# Altium PCB Power subsystem.PcbDoc
Units mil, origin at the board's own origin, x right, y up, seen from the top; angles counter-clockwise.
Board outline 5505 x 2760 mil, 4 copper layers (Top Layer, GND, POWER, Bottom Layer), stack 33.556 mil thick; 77 components, 45 nets, 268 pads, 141 vias.
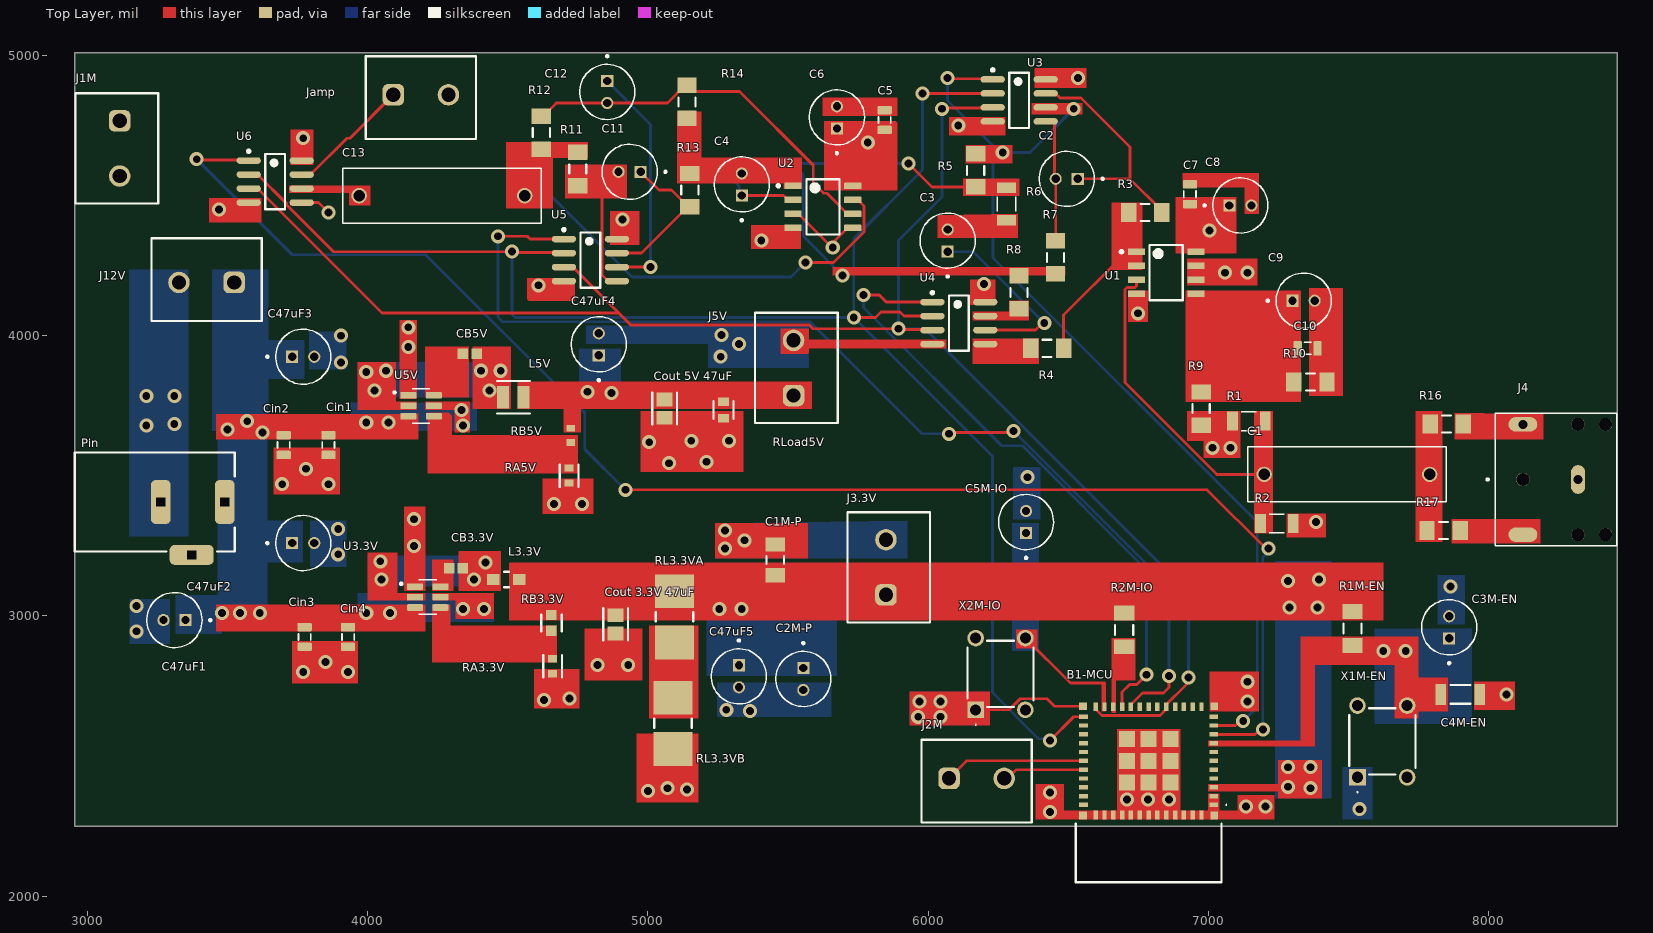
[diagram p0: Top Layer view]
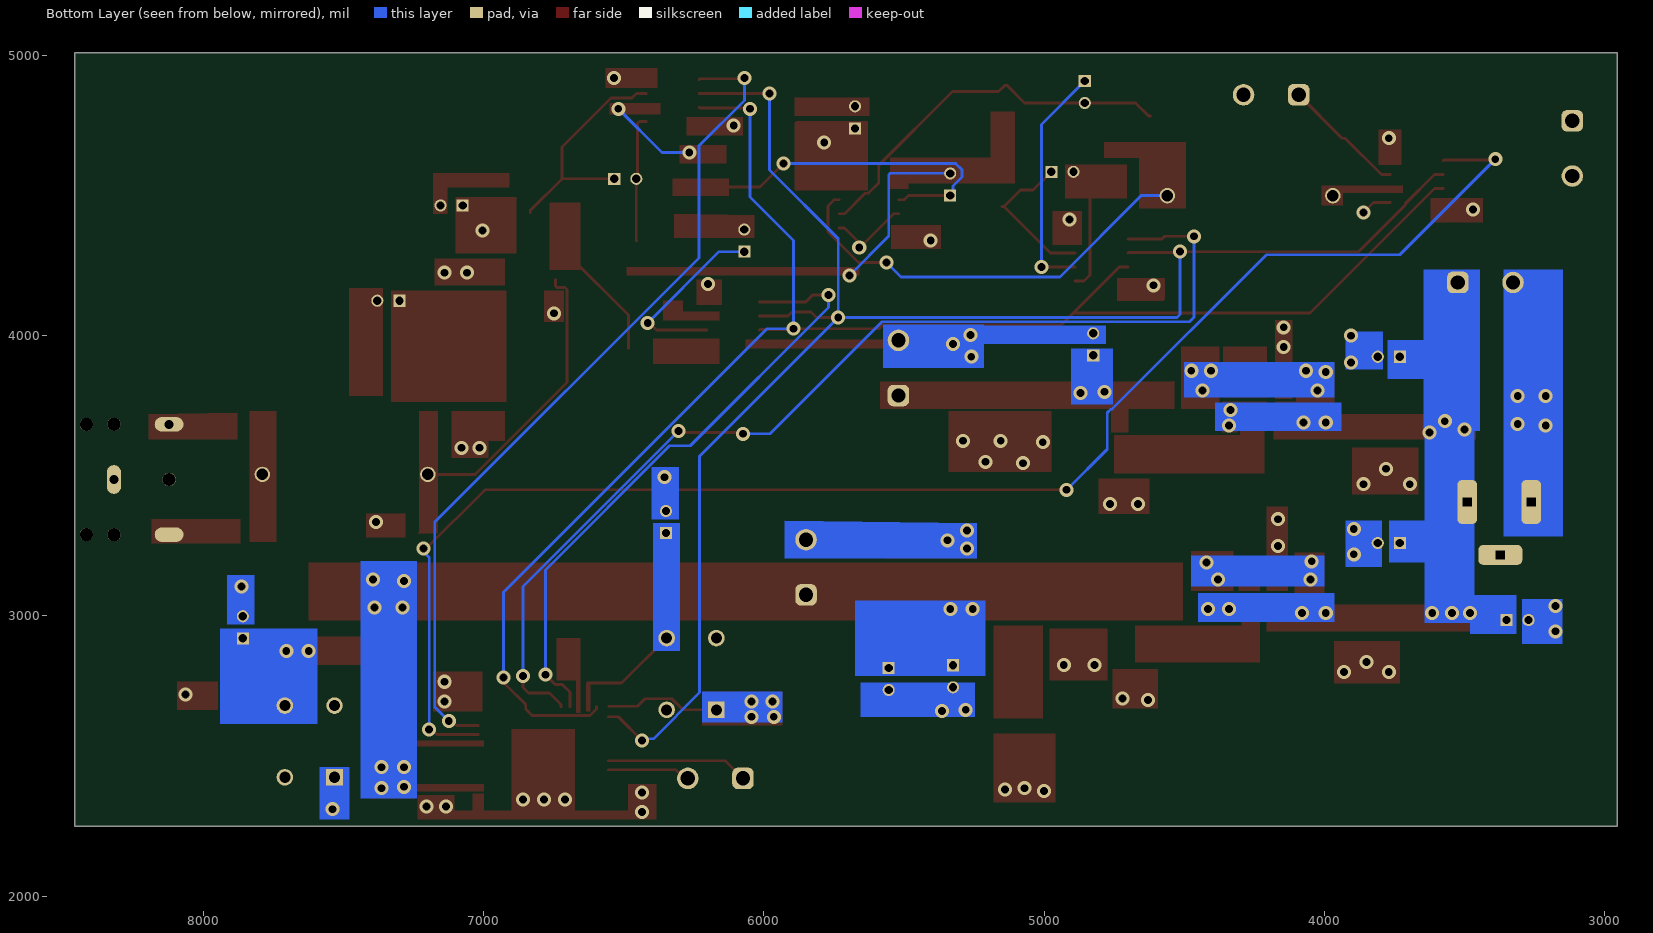
[diagram p1: Bottom Layer view, seen from below]
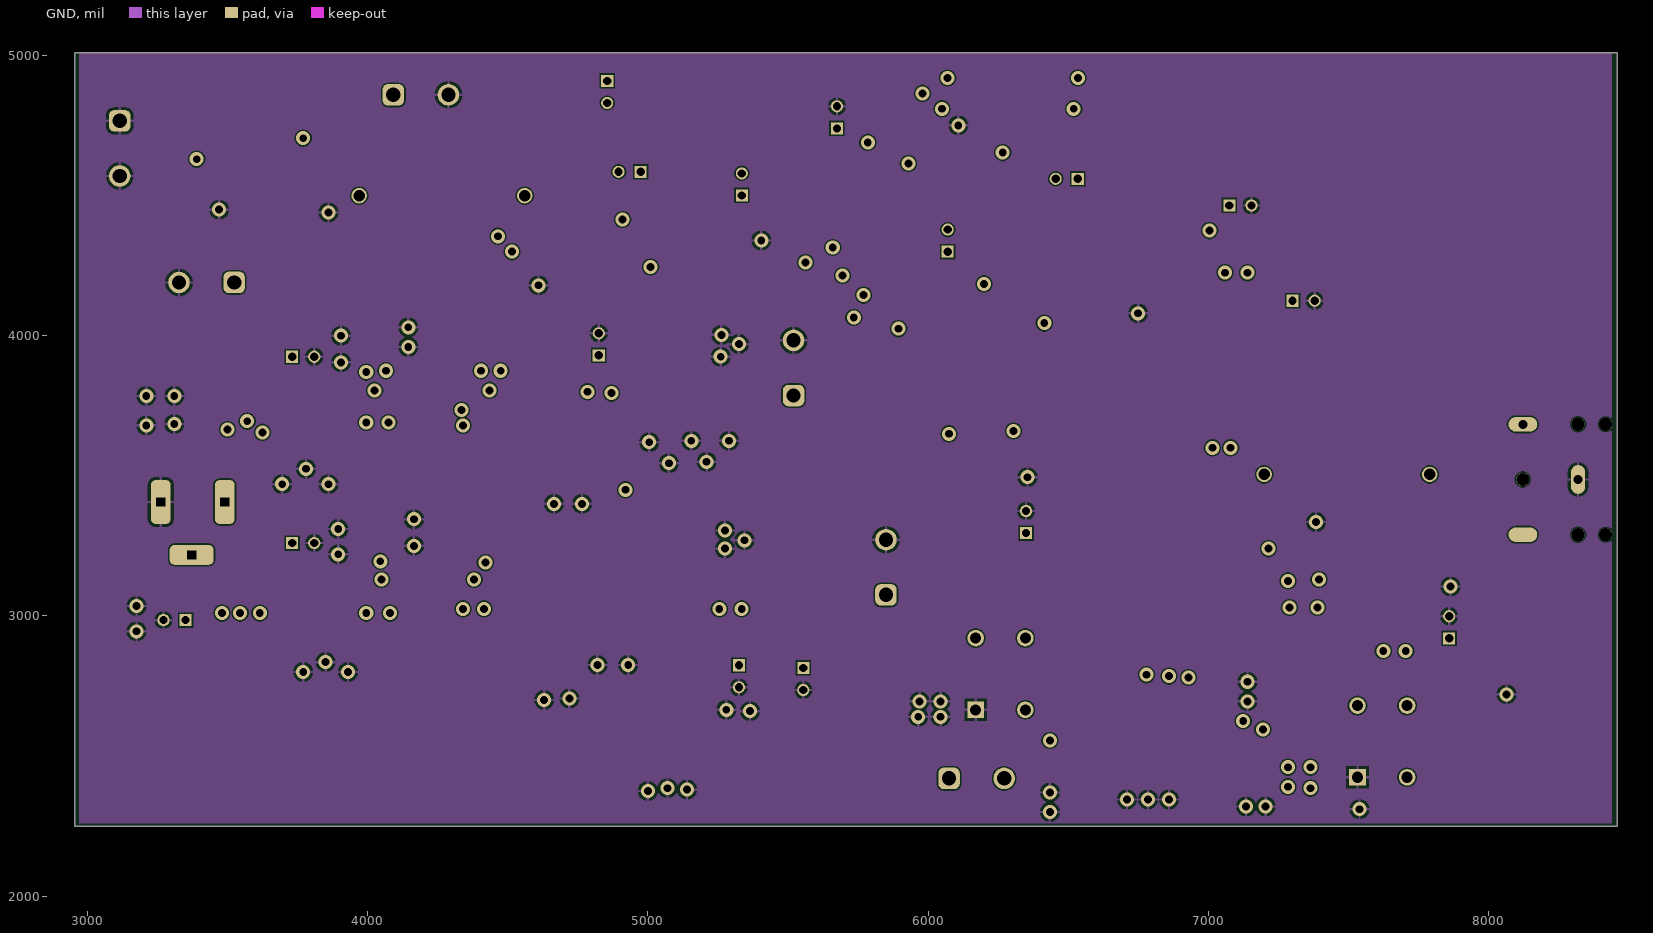
[diagram p2: GND]
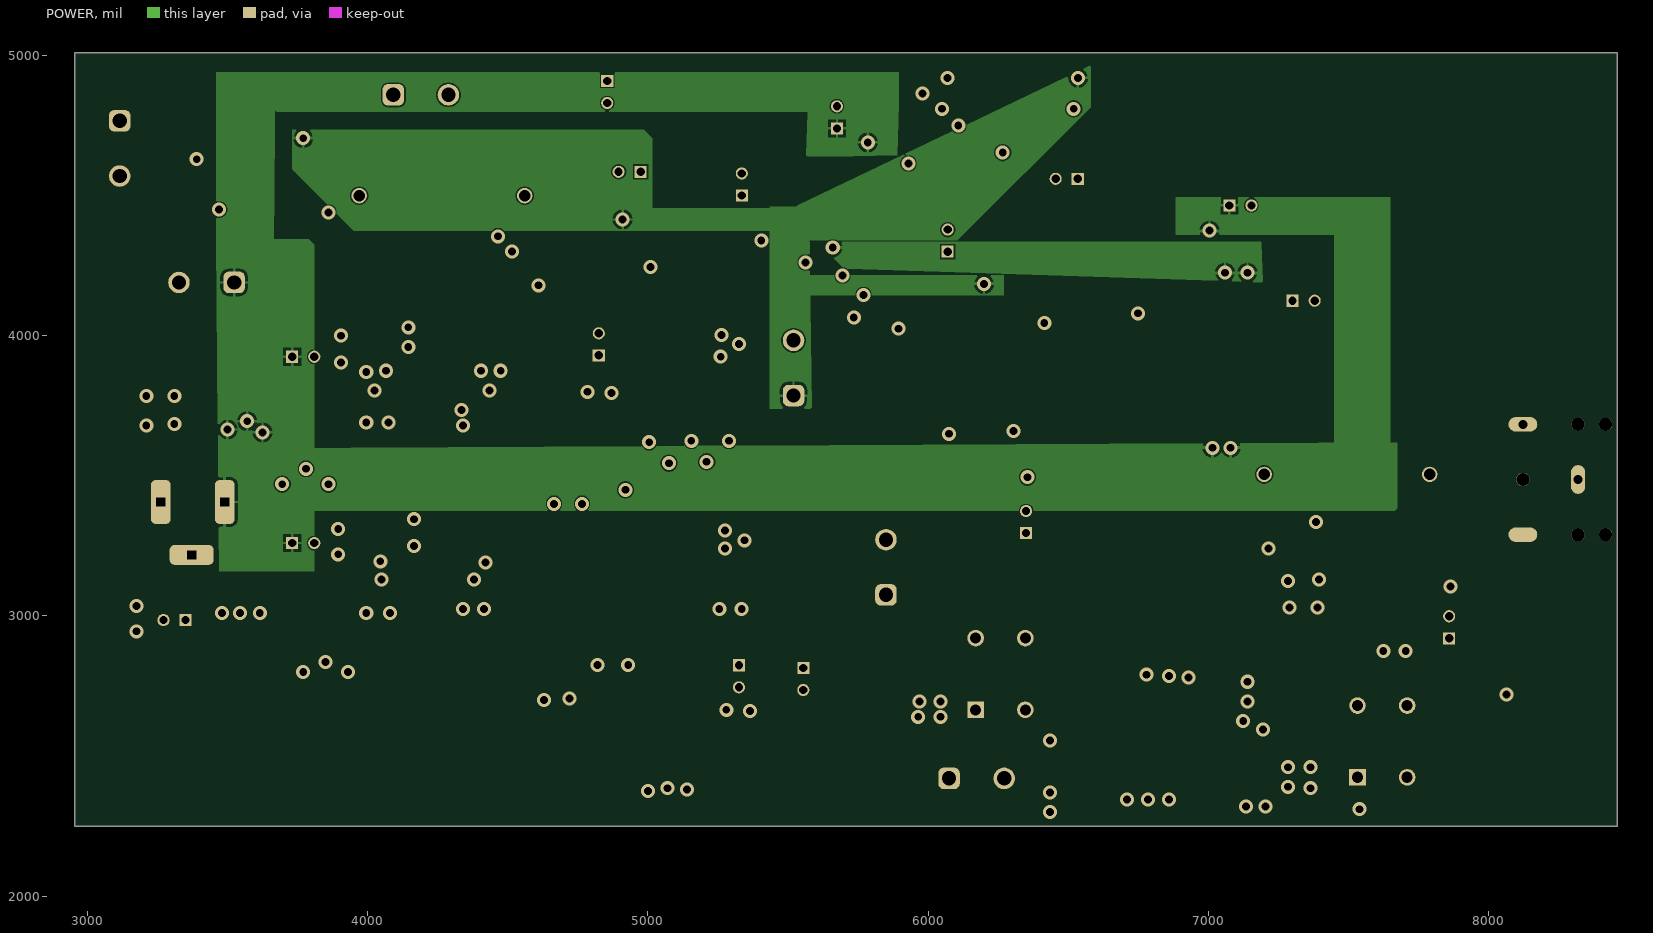
[diagram p3: POWER]
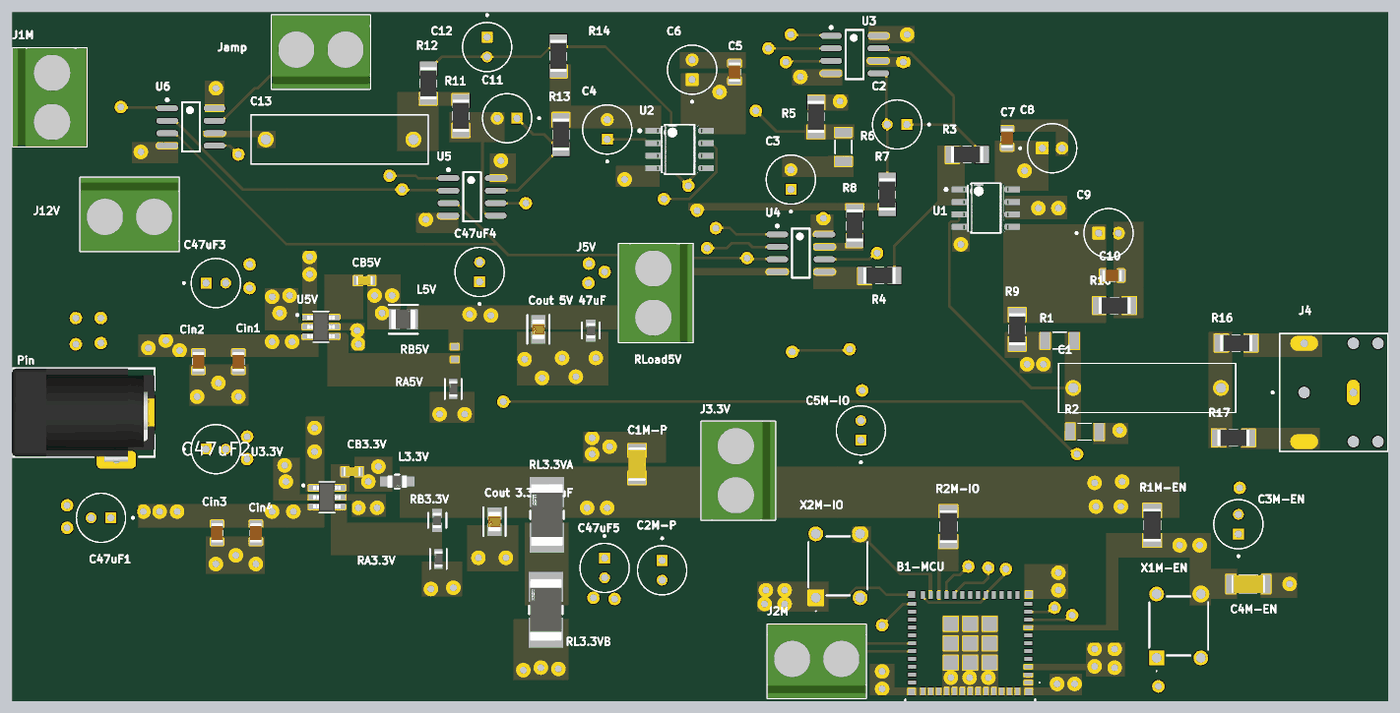
[diagram p4: 3D render of the assembled board from above, using the file's embedded part models]

## Layer stack, top to bottom
Top Solder: solder mask 0.4, Solder Resist, Dk 3.5
Top Layer: signal copper 1.4
Dielectric 1: dielectric 12.6, FR-4, Dk 4.8
GND: signal copper 1.378
Dielectric 2: prepreg 2.8, PP-006, Dk 4.1
POWER: signal copper 1.378
Dielectric 3: dielectric 12.6, FR-4, Dk 4.8
Bottom Layer: signal copper 1.4
Bottom Solder: solder mask 0.4, Solder Resist, Dk 3.5

## Board outline
2955,2250 2955,5010 8460,5010 8460,2250

## Design rules (kind name [scope] priority, off if disabled: settings)
Clearance [All] p1: gap=5 ignorepadtopadclearanceinfootprint=FALSE
MinimumSolderMaskSliver [All] p1: minsoldermaskwidth=5
PolygonConnect [All] p1: connectstyle=Relief reliefconductorwidth=10 reliefentries=4 polygonreliefangle="90 Angle" airgapwidth=10
RoutingVias [All] p1: holewidth=28 width=50 viastyle="Through Hole" minholewidth=28 minwidth=50 maxholewidth=28 maxwidth=50
SolderMaskExpansion [All] p1: expansion=4 istentingtop=FALSE
SupplyNets "Schematic Supply Nets" [InNet('GND')] p1: voltage=0.000
Width [All] p1: maxlimit=10 minlimit=5 preferedwidth=10
29 further rules are at their usual default settings.

## Classes and differential pairs
component class "mcu subsystem": B1-MCU C1M-P C2M-P C3M-EN C4M-EN C5M-IO J1M J2M R1M-EN R2M-IO X1M-EN X2M-IO
component class preamp_with_digital_pot: C1 C2 C3 C4 C5 C6 C7 C8 C9 C10 C11 C12 C13 J1 J2 J4 J5 J6 Jamp R1 R2 R3 R4 R5 R6 R7 R8 R9 R10 R11 R12 R13 R14 R16 R17 RV1 RV2 RV3 U1 U2 U3 U4 U5 U6
component class "Power subsystem": C47uF1 C47uF2 C47uF3 C47uF4 C47uF5 CB3.3V CB5V Cin1 Cin2 Cin3 Cin4 "Cout 3.3V 47uF" "Cout 5V 47uF" J3.3V J5V J12V L3.3V L5V Pin RA3.3V RA5V RB3.3V RB5V RL3.3VA RL3.3VB RLoad5V U3.3V U5V

## Components (designator, comment, footprint, x,y, rotation, side; value= is the part's Value field where it differs from the comment)
B1-MCU "ESP32-H2-MINI-1-H2S" ESP32H2MINI1H2S 6787.24,2376.46 r180 top
C1 "2.2uF" *CAPRR1500W80L1800T500H1050 7495,3505 r180 top
C1M-P "Capacitor 10 uF +/- 10% 16 V 1206" CAPC3216X180X50NL20T25 5455,3200 r90 top value=10µF
C2 "100nF" *CAPPRD200W50D500H1100_EEUFR1E470(Primary) 6495,4560 r180 top
C2M-P "100nF" *CAPPRD200W50D500H1100_EEUFR1E470(Primary) 5555,2775 r270 top
C3 "2.2nF" *CAPPRD200W50D500H1100_EEUFR1E470(Primary) 6070,4339.37 r90 top
C3M-EN "100nF" *CAPPRD200W50D500H1100_EEUFR1E470(Primary) 7860,2959.37 r90 top
C4 "22pF" *CAPPRD200W50D500H1100_EEUFR1E470(Primary) 5335.49,4540 r90 top
C4M-EN "Capacitor 1 uF +/- 10% 25 V 1206" CAPC3216X180X20ML20 7900,2720 r0 top value=1µF
C5 "Capacitor 10µF +/-20% 25V 0805" CAPC0805(2012)145_L 5845,4770 r90 top value=10µF
C5M-IO "100nF" *CAPPRD200W50D500H1100_EEUFR1E470(Primary) 6350,3335 r90 top
C6 "0.1uF" *CAPPRD200W50D500H1100_EEUFR1E470(Primary) 5675,4779.37 r90 top
C7 "Capacitor 10µF +/-20% 25V 0805" CAPC0805(2012)145_L 6935,4505 r90 top value=10µF
C8 "0.1uF" *CAPPRD200W50D500H1100_EEUFR1E470(Primary) 7115,4465 r0 top
C9 "0.1uF" *CAPPRD200W50D500H1100_EEUFR1E470(Primary) 7340.63,4125 r0 top
C10 "Capacitor 10µF +/-20% 25V 0805" CAPC0805(2012)145_L 7355,3955 r0 top value=10µF
C11 "15nF" *CAPPRD200W50D500H1100_EEUFR1E470(Primary) 4935,4585 r180 top
C12 "22nF" *CAPPRD200W50D500H1100_EEUFR1E470(Primary) 4855,4870 r270 top
C13 "2.2uF" *CAPRR1500W80L1800T500H1050 4265,4500 r180 top
C47uF1 "EEUFR1E470" *CAPPRD200W50D500H1100_EEUFR1E470(Primary) 3310.63,2985 r180 top
C47uF2 "EEUFR1E470" *CAPPRD200W50D500H1100_EEUFR1E470(Primary) 3770,3260 r0 top
C47uF3 "EEUFR1E470" *CAPPRD200W50D500H1100_EEUFR1E470(Primary) 3770,3925 r0 top
C47uF4 "EEUFR1E470" *CAPPRD200W50D500H1100_EEUFR1E470(Primary) 4825,3969.37 r90 top
C47uF5 "EEUFR1E470" *CAPPRD200W50D500H1100_EEUFR1E470(Primary) 5325,2784.37 r270 top
CB3.3V "Capacitor 100 nF +/-10% 50 V 0603" CAPC1608X90X40NL10T20 4315,3170 r0 top value=100nF
CB5V "Capacitor 100 nF +/-10% 50 V 0603" CAPC1608X90X40NL10T20 4364.61,3935 r0 top value=100nF
Cin1 "Capacitor 10µF +/-20% 25V 0805" CAPC0805(2012)145_L 3860,3610 r90 top value=10µF
Cin2 "Capacitor 10µF +/-20% 25V 0805" CAPC0805(2012)145_L 3700,3610 r90 top value=10µF
Cin3 "Capacitor 10µF +/-20% 25V 0805" CAPC0805(2012)145_L 3775,2925 r90 top value=10µF
Cin4 "Capacitor 10µF +/-20% 25V 0805" CAPC0805(2012)145_L 3930,2925 r90 top value=10µF
"Cout 3.3V 47uF" "GRM21BR60J476ME11L" FP-GRM21B-0_2-e0_2_0_7-IPC_B 4885,2970 r270 top
"Cout 5V 47uF" "GRM21BR60J476ME11L" FP-GRM21B-0_2-e0_2_0_7-IPC_B 5060,3740 r270 top
J1M "691137710002" 691137710002 3105.16,4668.43 r270 top
J2M "691137710002" 691137710002 6173.43,2410.16 r0 top
J3.3V "691137710002" 691137710002 5859.84,3173.43 r90 top
J4 "SJ1-3523N" *CUI_SJ1-3523N 8320,3486.85 r90 top
J5V "691137710002" 691137710002 5530,3885 r90 top
J12V "691137710002" 691137710002 3425,4200 r180 top
Jamp "691137710002" 691137710002 4190,4850 r0 top
L3.3V "LQM21PN3R3MGRD" FP-LQM21PH_G0-MFG 4495,3130 r0 top
L5V "MLP2520S4R7MT0S1" FP-MLP2520M-IPC_C 4520,3780 r0 top
Pin "694108301002" 694108301002 3240,3406.55 r270 top
R1 "100k" *RESC3116X65N 7145,3695 r180 top
R1M-EN "Resistor 10k +/-1% 1206 250 mW" RESC3216X60X45ML15T20 7515,2955 r270 top value=10k
R2 "100k" *RESC3116X65N 7245,3330 r180 top
R2M-IO "Resistor 10k +/-1% 1206 250 mW" RESC3216X60X45ML15T20 6700,2950 r90 top value=10k
R3 "5k" RESC3116X70X50ML13T20 6775,4440 r180 top
R4 "2.8k" RESC3116X70X50ML13T20 6425,3955 r180 top
R5 "22" RESC3116X70X50ML13T20 6170,4590 r270 top value=22k
R6 "4.7k" *RESC3116X65N 6280,4470 r90 top
R7 "5k" RESC3116X70X50ML13T20 6455,4280 r270 top
R8 "2.8k" RESC3116X70X50ML13T20 6325,4155 r270 top
R9 "47k" RESC3116X70X50ML13T20 6975,3740 r270 top
R10 "47k" RESC3116X70X50ML13T20 7365,3835 r180 top
R11 "3.6k" RESC3116X70X50ML13T20 4750,4595 r270 top
R12 "47k" RESC3116X70X50ML13T20 4620,4725 r270 top
R13 "3.6k" RESC3116X70X50ML13T20 5150,4520 r270 top
R14 "47k" RESC3116X70X50ML13T20 5140,4835 r90 top
R16 "2.2k" RESC3116X70X50ML13T20 7850.94,3685 r0 top
R17 "2.2k" RESC3116X70X50ML13T20 7840,3305 r0 top
RA3.3V "RC0603FR-0710KL" FP-RC0603-0_55-IPC_C 4660,2820 r90 top
RA5V "RC0603FR-0710KL" FP-RC0603-0_55-IPC_C 4719.14,3500.86 r90 top
RB3.3V "CRCW060333K2FKEA" FP-CRCW0603-e3-IPC_B 4655,2975 r90 top
RB5V "RC0603FR-0756K2L" RESC1608X55X25LL10T15 4725,3644.41 r90 top
RL3.3VA "CPA2512Q3R30FS-T10" FP-CPA2512-MFG 5095,2996.54 r90 top
RL3.3VB "CPA2512Q3R30FS-T10" FP-CPA2512-MFG 5090,2616.54 r90 top
RLoad5V "CRCW06031K20FKEA" FP-CRCW0603-e3-MFG 5270,3735 r90 top
U1 "OPA1656ID" FP-D0008A-MFG 6850,4225 r0 top
U2 "OPA1656ID" FP-D0008A-MFG 5625,4460 r0 top
U3 "MCP4131T-103E/SN" SOIC-SN8_N 6325.51,4840 r0 top
U3.3V "TPS561201DDCR" SOT95P280X110-6N 4214.53,3067.4 r0 top
U4 "MCP4131T-103E/SN" SOIC-SN8_N 6110,4045 r0 top
U5 "MCP4131T-103E/SN" SOIC-SN8_N 4795,4270 r0 top
U5V "TPS561201DDCR" SOT95P280X110-6N 4190.47,3750 r0 top
U6 "MCP4131T-103E/SN" SOIC-SN8_N 3670,4550 r0 top
X1M-EN "TS02-66-43-BK-100-LCR-D" TS026643BK100LCRD 7532.83,2424.09 r90 top
X2M-IO "TS02-66-43-BK-100-LCR-D" TS026643BK100LCRD 6170,2665 r90 top

## Footprints (in the part's own frame and the unit in brackets; to place one, negate y for a bottom-side part, rotate by r counter-clockwise, add the part's x,y. Pads: shape width x height; smd on the part's side, far side on the other; paste and mask are expansions set on the pad)
691137710002 [mm] "Horizontal Cable Entry with Pressure Clamp, pitch 5mm, 02p"
  rrect50% 1.95x1.95 hole 1.3: 1(-2.5,0.25)
  round 1.95 hole 1.3: 2(2.5,0.25)
  silkscreen extent -5,-3.75 5,3.75, body extent -5,-3.75 5,3.75, height 11.6
694108301002 [mm] "DC Power Jack Right Angled(6.4)"
  rrect50% 4x1.8 hole 0.8 square: 1(0,6.35) 2(0,0.55)
  rrect50% 1.8x4 hole 0.8 square: 3(4.8,3.35)
  silkscreen extent -4.5,-7.25 4.5,7.25, body extent -4.5,-7.25 5,7.25, height 10.75
*CAPPRD200W50D500H1100_EEUFR1E470(Primary) [mm]
  round 1.1 hole 0.75: N(1,0)
  rect 1.1x1.1 hole 0.75: P(-1,0)
  silkscreen extent -3.35,-2.5 2.5,2.5
*CAPRR1500W80L1800T500H1050 [mm]
  round 1.4 hole 1.05: 1(-7.5,0) 2(7.5,0)
  silkscreen extent -9,-2.5 9,2.5
*CUI_SJ1-3523N [mm]
  oval 2.616x1.308 hole 0.8: 1(0,0)
  oval 1.308x2.616 hole 0.8: 2(5,5)
  oval 1.308x2.616 all layers, no hole: 3(-5,5)
  round 1.2 hole 1.2 unplated: None(-5,-2.5) None(-5,0) None(0,5) None(5,-2.5) None(5,0)
  silkscreen extent -6,-3.5 6,8.3
*RESC3116X65N [mm]
  rect 0.97x1.73 smd: 1(-1.48,0) 2(1.48,0)
  silkscreen extent -0.67,-0.85 0.67,0.85
CAPC0805(2012)145_L [mm] "Chip Capacitor, Body 2.0x1.2mm, Height 1.45mm, IPC High Density"
  rrect25% 0.76x1.3 smd: 1(-0.9,0) 2(0.89,0)
  silkscreen extent -0.3,-0.55 0.3,0.55, body extent -1,-0.6 1,0.6, height 1.45
CAPC1608X90X40NL10T20 [mm] "Chip Capacitor, 2-Leads, Body 1.70x0.90mm, IPC Medium Density"
  rect 0.95x0.95 smd: 1(-0.625,0) 2(0.625,0)
  body extent -0.85,-0.45 0.85,0.45, height 0.9
CAPC3216X180X20ML20 [mm] "Chip Capacitor, 2-Leads, Body 3.40x1.80mm, IPC Low Density"
  rect 0.95x1.9 smd: 1(-1.775,0) 2(1.775,0)
  silkscreen extent -0.9,-0.85 0.9,0.85, body extent -1.7,-0.9 1.7,0.9, height 1.8
CAPC3216X180X50NL20T25 [mm] "Chip Capacitor, 2-Leads, Body 3.40x1.80mm, IPC Medium Density"
  rect 1.3x1.8 smd: 1(-1.4,0) 2(1.4,0)
  silkscreen extent -0.35,-0.8 0.35,0.8, body extent -1.7,-0.9 1.7,0.9, height 1.8
ESP32H2MINI1H2S [mm]
  rect 0.8x0.4 smd: 1(-5.9,1.3) 2(-5.9,0.5) 3(-5.9,-0.3) 4(-5.9,-1.1) 5(-5.9,-1.9) 6(-5.9,-2.7) 7(-5.9,-3.5) 8(-5.9,-4.3) 9(-5.9,-5.1) 10(-5.9,-5.9) 11(-5.9,-6.7) 25(5.9,-6.7) 26(5.9,-5.9) 27(5.9,-5.1) 28(5.9,-4.3) 29(5.9,-3.5) 30(5.9,-2.7) 31(5.9,-1.9) 32(5.9,-1.1) 33(5.9,-0.3) 34(5.9,0.5) 35(5.9,1.3)
  rect 0.4x0.8 smd: 12(-4.8,-7.6) 13(-4,-7.6) 14(-3.2,-7.6) 15(-2.4,-7.6) 16(-1.6,-7.6) 17(-0.8,-7.6) 18(0,-7.6) 19(0.8,-7.6) 20(1.6,-7.6) 21(2.4,-7.6) 22(3.2,-7.6) 23(4,-7.6) 24(4.8,-7.6) 36(4.8,2.2) 37(4,2.2) 38(3.2,2.2) 39(2.4,2.2) 40(1.6,2.2) 41(0.8,2.2) 42(0,2.2) 43(-0.8,2.2) 44(-1.6,2.2) 45(-2.4,2.2) 46(-3.2,2.2) 47(-4,2.2) 48(-4.8,2.2)
  rect 1.45x1.45 smd: 49(0,-2.7) 54(-1.975,-0.725) 55(-1.975,-2.7) 56(-1.975,-4.675) 57(0,-4.675) 58(1.975,-4.675) 59(1.975,-2.7) 60(1.975,-0.725) 61(0,-0.725)
  rect 0.7x0.7 smd: 50(5.95,2.25) 51(5.95,-7.65) 52(-5.95,-7.65) 53(-5.95,2.25)
  silkscreen extent -7.1,1.25 6.6,8.3
FP-CPA2512-MFG [mm]
  rect 3.05x3.5 smd paste+0 mask+0: 1(-2.325,0) 2(2.325,0)
  silkscreen extent -0.42,-1.7 0.43,1.7, body extent -3.95,-1.85 3.95,1.85, height 0.25
FP-CRCW0603-e3-IPC_B [mil]
  rect 36.81x37.88 smd paste+0 mask+0: 1(-28.17,0) 2(28.17,0)
  silkscreen extent -30,-37 30,35, body extent -56,-29 56,29, height 10
FP-CRCW0603-e3-MFG [mm]
  rect 0.75x1 smd paste+0 mask+0: 1(-0.75,0) 2(0.75,0)
  silkscreen extent -0.8,-0.9 0.8,0.9, body extent -1.22,-0.6 1.22,0.6, height 0.25
FP-D0008A-MFG [mm]
  rrect17% 1.55x0.6 smd paste+0 mask+0: 1(-2.7,1.905) 2(-2.7,0.635) 3(-2.7,-0.635) 4(-2.7,-1.905) 5(2.7,-1.905) 6(2.7,-0.635) 7(2.7,0.635) 8(2.7,1.905)
  silkscreen extent -4.17,-2.5 1.5,2.5, body extent -3.57,-2.75 3.57,2.75, height 0.25
FP-GRM21B-0_2-e0_2_0_7-IPC_B [mil]
  rect 49.4x57.33 smd paste+0 mask+0: 1(-32.51,0) 2(32.51,0)
  silkscreen extent -57,-44 57,44, body extent -67,-39 67,39, height 10
FP-LQM21PH_G0-MFG [mm]
  rect 1.15x1 smd paste+0 mask+0: 1(-1.175,0) 2(1.175,0)
  silkscreen extent -0.22,-0.7 0.22,0.7, body extent -1.85,-0.8 1.85,0.8, height 0.25
FP-MLP2520M-IPC_C [mil]
  rect 43.52x81.03 smd paste+0 mask+0: 1(-36.47,0) 2(36.47,0)
  silkscreen extent -58,-58 58,58, body extent -62,-46 62,46, height 10
FP-RC0603-0_55-IPC_C [mil]
  rect 25.93x31.97 smd paste+0 mask+0: 1(-26.64,0) 2(26.64,0)
  silkscreen extent -40,-33 40,33, body extent -44,-22 44,22, height 10
RESC1608X55X25LL10T15 [mm] "Chip Resistor, 2-Leads, Body 1.70x0.90mm, IPC High Density"
  rect 0.6x0.8 smd: 1(-0.65,0) 2(0.65,0)
  body extent -0.85,-0.45 0.85,0.45, height 0.55
RESC3116X70X50ML13T20 [mm] "Chip Resistor, 2-Leads, Body 3.25x1.65mm, IPC Low Density"
  rect 1.4x1.75 smd: 1(-1.5,0) 2(1.5,0)
  silkscreen extent -0.4,-0.77 0.4,0.77, body extent -1.63,-0.82 1.63,0.82, height 0.7
RESC3216X60X45ML15T20 [mm] "Chip Resistor, 2-Leads, Body 3.3x1.75mm, IPC Low Density"
  rect 1.35x1.85 smd: 1(-1.525,0) 2(1.525,0)
  silkscreen extent -0.45,-0.82 0.45,0.82, body extent -1.65,-0.87 1.65,0.87, height 0.6
SOIC-SN8_N [mm] "SOIC, 8-Leads, Body 4.9x3.9mm, Pitch 1.27mm, IPC Medium Density"
  oval 2.2x0.6 smd: 1(-2.4,1.905) 2(-2.4,0.635) 3(-2.4,-0.635) 4(-2.4,-1.905) 5(2.4,-1.905) 6(2.4,-0.635) 7(2.4,0.635) 8(2.4,1.905)
  silkscreen extent -2.52,-2.5 0.9,2.88, body extent -2,-2.5 2,2.5, height 1.75
SOT95P280X110-6N [mm]
  rrect25% 1.45x0.59 smd: 1(-1.155,0.95) 2(-1.155,0) 3(-1.155,-0.95) 4(1.155,-0.95) 5(1.155,0) 6(1.155,0.95)
  silkscreen extent -2.5,-1.56 0.8,1.57, body extent -1.4,-1.45 1.4,1.45, height 1.1
TS026643BK100LCRD [mm]
  rect 1.5x1.5 hole 1: 1(0,0)
  round 1.5 hole 1: 2(6.5,0) 3(0,-4.5) 4(6.5,-4.5)
  silkscreen extent -1.4,-5.25 6.25,0.75

## Part data
B1-MCU: library part CMP-005-000000-1, "802.15.4, Bluetooth Bluetooth v5.3, Zigbee Transceiver Module 2.4GHz PCB Trace Surface Mount, 3V ~ 3.6V , -40C ~ 105C (TA)", Manufacturer_Name="Espressif Systems", Datasheet Link=https://documentation.espressif.com/api/resource/doc/file/nzV9jBYD/FILE/esp32-h2-mini-1_mini-1u_datasheet_en.pdf, Design Item ID=ESP32-H2-MINI-1-H2S, Geometry.Height=2.55mm, Manufacturer_Part_Number=ESP32-H2-MINI-1-H2S, Source=ESP32-H2-MINI-1-H2S.SchLib
C1 C13: library part B32522C0225J000, "2.2 ÂµF Film Capacitor 40V 63V Polyester, Polyethylene Terephthalate (PET), Metallized - Stacked Radial", Package="NON-STANDARD-2 TDK", Check_prices=https://www.snapeda.com/parts/B32522C0225J000/TDK/view-part/?ref=eda, DigiKey_Part_Number=495-1126-ND, MF=TDK, MP=B32522C0225J000, SnapEDA_Link=https://www.snapeda.com/parts/B32522C0225J000/TDK/view-part/?ref=snap
C1M-P: library part CMP-001-00016-6, "Chip Capacitor, 10 uF, +/- 10%, 16 V, 1206 (3216 Metric)", Capacitor Type=Ceramic, Case/Package=1206, Max Operating Temperature=125°C, Min Operating Temperature=-55°C, Tolerance=10%, Voltage Rating=16V, Mounting Technology=SM, Pins=2, RoHS Compliant=True
C2 C2M-P C3 C3M-EN C4 C5M-IO C6 C8 C9 C11 C12: library part EEUFR1E470
C4M-EN: library part CMP-001-00006-6, "Chip Capacitor, 1 uF, +/- 10%, 25 V, 1206 (3216 Metric)", Capacitor Type=Ceramic, Case/Package=1206, Max Operating Temperature=125°C, Min Operating Temperature=-55°C, Tolerance=10%, Voltage Rating=25V, Mounting Technology=SM, Pins=2, RoHS Compliant=True
C5 C7 C10 Cin1 Cin2 Cin3 Cin4: library part CMP-001-00079-4, "Chip Capacitor, 10µF +/-20%, 25V, 0805, Thickness 1.45 mm", Case/Package=0805, Max Operating Temperature=85°C, Min Operating Temperature=-55°C, Tolerance=10%, Voltage Rating=25V, Mounting Technology=SMT, Pins=2
CB3.3V CB5V: library part CMP-001-00017-6, "Chip Capacitor, 100 nF, +/- 10%, 50 V, 0603 (1608 Metric)", Capacitor Type=Ceramic, Case/Package=0603, Max Operating Temperature=125°C, Min Operating Temperature=-55°C, Tolerance=10%, Voltage Rating=50V, Mounting Technology=SM, Pins=2, RoHS Compliant=True
"Cout 3.3V 47uF" "Cout 5V 47uF": library part CMP-06035-028650-1, "Chip Multilayer Ceramic Capacitors for General Purpose, 0805, 47uF, X5R, 15%, 20%, 6.3V", Capacitance=47uF, Case/Package=0805, Dielectric=X5R, Tolerance=20%, Voltage Rating (DC)=6.3V, Length=2mm, Thickness=1.25mm, Width=1.25mm
J1M J2M J3.3V J5V J12V Jamp: library part CMP-1502-03324-2, Current Rating=16A, Max Operating Temperature=120°C, Min Operating Temperature=-30°C, Voltage Rating=300V, Contact Material="Nickel, Tin", Height=11.6mm, Lead Pitch=5mm, NexarPartId=78871135, Number of Contacts=2, Number of Pins=2, Number of Rows=1, Packaging=Box, RoHS=Non-Compliant
J4: "3.5 mm, Stereo, Right Angle, Through Hole, 3 Conductors, 0 Internal Switches, Audio Jack Connector", Package=None, Check_prices=https://www.snapeda.com/parts/SJ1-3523N/Same+Sky/view-part/?ref=eda, DigiKey_Part_Number=CP1-3523N-ND, MF="Same Sky", MP=SJ1-3523N, SnapEDA_Link=https://www.snapeda.com/parts/SJ1-3523N/Same+Sky/view-part/?ref=snap
L3.3V: library part CMP-06042-017013-1, "Multilayer Type Inductor for Power Lines, 0805 (2012), 3.3μH, 20%, 0.188Ω, 1.0A", Case/Package=0805, Current Rating=1A, DC Resistance (DCR)=188mR, Inductance=3.3uH, Max Operating Temperature=125°C, Min Operating Temperature=-55°C, Package Quantity=4000, Self Resonant Frequency=30MHz, Test Frequency=1MHz, Tolerance=20%, Core Material=Ferrite, Height - Seated (Max)=0.039inch, Length=0.079inch, Mount="Surface Mount", Packaging="Tape and Reel", RoHS Compliant=Yes, Shielding=Shielded, Width=0.049inch
L5V: library part CMP-08253-000319-1, "Shielded Multilayer Inductor 4.7uH ±20% 1000mA 169mΩ SMD 1008", Case Code (Imperial)=1008, Case Code (Metric)=2520, Current Rating=1A, DC Resistance (DCR)=169mR, Inductance=4.7uH, Max Operating Temperature=125°C, Min Operating Temperature=-40°C, Package Quantity=3000, Test Frequency=2MHz, Tolerance=20%, Case/Package=1008, Core Material=Ferrite, Height - Seated (Max)=0.039inch, Length=0.098inch, Mount="Surface Mount", Packaging="Tape and Reel", RoHS Compliant=Yes, Shielding=Shielded, Width=0.079inch
Pin: library part CMP-1502-00190-3, Color=Black, Current Rating=5A, Flammability Rating="UL94 V-0", Insulation Resistance=100MΩ, Max Operating Temperature=85°C, Min Operating Temperature=-40°C, Operating Supply Voltage=24V, Voltage Rating (DC)=20V, Connector Type=Power, Contact Gender=Female, Contact Material="Gold, Tin", Contact Plating=Tin, Gender=Male, Height=11mm, Housing Material=Polyamide, Mount="Through Hole", NexarPartId=52676102, Number of Contacts=3, Packaging=Bulk, REACH SVHC=Unknown, RoHS=Compliant, Shielding=Unshielded, Termination="Through Hole", Voltage Rating=24V
R1 R2: library part RC1206FR-07100KL, "100 kOhms Â±1% 0.25W, 1/4W Chip Resistor 1206 (3216 Metric) Moisture Resistant Thick Film", Package="3116 Yageo", Check_prices=https://www.snapeda.com/parts/RC1206FR-07100KL/Yageo/view-part/?ref=eda, DigiKey_Part_Number=311-100KFRCT-ND, MF=Yageo, MP=RC1206FR-07100KL, SnapEDA_Link=https://www.snapeda.com/parts/RC1206FR-07100KL/Yageo/view-part/?ref=snap
R1M-EN R2M-IO: library part CMP-009-00016-5, "Chip Resistor, 10 KOhm, +/- 1%, 0.25 W, -55 to 155 degC, 1206 (3216 Metric)", Case/Package=1206, Max Operating Temperature=155°C, Min Operating Temperature=-55°C, Power=250mW, Tolerance=1%, Voltage Rating=200V, Mounting Technology=SM, Pins=2, RoHS Compliant=True
R3 R7: library part CMP-009-00008-5, "Chip Resistor, 5k Ohm, 0.25 W, -55 to 155 degC, 1206 (3216 Metric)", Case/Package=1206, Max Operating Temperature=155°C, Min Operating Temperature=-55°C, Power=250mW, Tolerance=0.05%, Voltage Rating=200V, Mounting Technology=SM, Pins=2, RoHS Compliant=True
R4 R8: library part CMP-009-00008-5, "Chip Resistor, 2.8k Ohm, 0.25 W, -55 to 155 degC, 1206 (3216 Metric)", Case/Package=1206, Max Operating Temperature=155°C, Min Operating Temperature=-55°C, Power=250mW, Tolerance=0.05%, Voltage Rating=200V, Mounting Technology=SM, Pins=2, RoHS Compliant=True
R5: library part CMP-009-00008-5, "Chip Resistor, 22k Ohm, 0.25 W, -55 to 155 degC, 1206 (3216 Metric)", Case/Package=1206, Max Operating Temperature=155°C, Min Operating Temperature=-55°C, Power=250mW, Tolerance=0.05%, Voltage Rating=200V, Mounting Technology=SM, Pins=2, RoHS Compliant=True
R6: library part RC1206FR-074K7L, "4.7 kOhms Â±1% 0.25W, 1/4W Chip Resistor 1206 (3216 Metric) Moisture Resistant Thick Film", Package="3116 Yageo", Check_prices=https://www.snapeda.com/parts/RC1206FR-074K7L/Yageo/view-part/?ref=eda, DigiKey_Part_Number=311-4.70KFRCT-ND, MF=Yageo, MP=RC1206FR-074K7L, SnapEDA_Link=https://www.snapeda.com/parts/RC1206FR-074K7L/Yageo/view-part/?ref=snap
R9 R10 R12 R14: library part CMP-009-00008-5, "Chip Resistor, 47k Ohm, 0.25 W, -55 to 155 degC, 1206 (3216 Metric)", Case/Package=1206, Max Operating Temperature=155°C, Min Operating Temperature=-55°C, Power=250mW, Tolerance=0.05%, Voltage Rating=200V, Mounting Technology=SM, Pins=2, RoHS Compliant=True
R11 R13: library part CMP-009-00008-5, "Chip Resistor, 3.6k Ohm, 0.25 W, -55 to 155 degC, 1206 (3216 Metric)", Case/Package=1206, Max Operating Temperature=155°C, Min Operating Temperature=-55°C, Power=250mW, Tolerance=0.05%, Voltage Rating=200V, Mounting Technology=SM, Pins=2, RoHS Compliant=True
R16 R17: library part CMP-009-00008-5, "Chip Resistor, 2.2k Ohm, 0.25 W, -55 to 155 degC, 1206 (3216 Metric)", Case/Package=1206, Max Operating Temperature=155°C, Min Operating Temperature=-55°C, Power=250mW, Tolerance=0.05%, Voltage Rating=200V, Mounting Technology=SM, Pins=2, RoHS Compliant=True
RA3.3V RA5V: library part CMP-2100-03664-2, "RES 10K OHM 1% 1/10W 0603", Case Code (Imperial)=0603, Case Code (Metric)=1608, Max Operating Temperature=155°C, Max Power Dissipation=100mW, Min Operating Temperature=-55°C, Resistance=10kR, Resistance Tolerance=1%, Resistor Type="Thick Film", Temperature Coefficient=100ppm/°C, Voltage Rating=75V, Voltage Rating (DC)=50V, Case/Package=0603, Construction=Rectangular, Depth=0.8mm, Features="Moisture Resistant", Height=0.45mm, Lead Free="Lead Free", Lead Pitch=0.3mm, Length=1.6mm, Military Standard=Not, Number of Pins=2, Number of Terminations=2, Packaging="Tape and Reel", Power Rating=100mW, RoHS Compliant=Yes, Series=RC, Size Code=0603, Termination=SMD/SMT, Tolerance=1%, Weight=7.1E-05oz, Width=0.8mm
RB3.3V: library part CMP-2000-03248-2, "RES Thick Film, 33.2kΩ, 1%, 0.1W, 100ppm/°C, 0603", Case Code (Imperial)=0603, Case Code (Metric)=1608, Max Operating Temperature=155°C, Max Power Dissipation=100mW, Min Operating Temperature=-55°C, Package Quantity=5000, Resistance=33.2kR, Temperature Coefficient=100ppm/°C, Tolerance=1%, Voltage Rating=75V, Case/Package=0603, Composition="Thick Film", Contact Plating=Tin, Depth=0.85mm, Features="Automotive AEC-Q200", Height=0.45mm, Lead Free="Lead Free", Length=1.55mm, Military Standard=Not, Mount="Surface Mount", Number of Pins=2, Number of Terminations=2, Packaging="Tape and Reel", Power Rating=100mW, Radiation Hardening=No, Termination=SMD/SMT, Voltage Rating (DC)=75V, Weight=7.1E-05oz, Width=0.85mm
RB5V: library part CMP-1659-00050-1, "Chip Resistor, 56.2 KOhm, +/- 1%, 0.1 W, -55 to 155 degC, 0603 (1608 Metric), RoHS, Tape and Reel", Colour=Black, Current Rating="1 A", Max Operating Temperature="50 degC", Min Operating Temperature="0 degC", Package Quantity=24000, Voltage Rating="30 V", ComponentLink1Description="Manufacturer URL", ComponentLink1URL=http://www.yageo.com/, ComponentLink2Description=Datasheet, ComponentLink2URL=http://www.yageo.com/documents/recent/PYu-RC_Group_51_RoHS_L_04.pdf, Connector Type=USB, Contact Material=Copper, Contact Plating=Gold, DatasheetVersion="Rev. 4, 02/2016", Gender=Female, Height="15 mm", Length="14.5 mm", Mount="Through Hole", PackageDescription="2-Pin Surface Mount Device, Body 1.6 x 0.8 mm", PackageReference=0603, Packaging=Tray, Pins=4, Radiation Hardening=No, REACH SVHC=Unknown, RoHSCompliant=true, Width="7.12 mm"
RL3.3VA RL3.3VB: library part CMP-00597-19168341-1, "CPA2512Q3R30FS-T10 CPA Series 2512 16 W 3.3O ±1% ±50 ppm/°C SMT Thin Film Chip Power Resistor", Case Code (Imperial)=2512, Case Code (Metric)=6432, Max Operating Temperature=155°C, Max Power Dissipation=16W, Min Operating Temperature=-55°C, Resistance=3.3Ω, Temperature Coefficient=50ppm/°C, Tolerance=1%, Case/Package=2512, Composition="Thin Film", Features="Moisture Resistant", Height=787.4µm, Lead Free="Lead Free", Length=6.2992mm, Lifecycle Status=Production, NexarPartId=19168341, Number of Terminations=2, Packaging="Cut Tape (CT)", Power Rating=16W, RoHS=Compliant, Width=3.2mm
RLoad5V: library part CMP-2000-02982-2, "RES Thick Film, 1.2kΩ, 1%, 0.1W, 100ppm/°C, 0603", Case Code (Imperial)=0603, Case Code (Metric)=1608, Max Operating Temperature=155°C, Max Power Dissipation=100mW, Min Operating Temperature=-55°C, Package Quantity=10, Resistance=1.2kR, Temperature Coefficient=100ppm/°C, Tolerance=1%, Voltage Rating=75V, Case/Package=0603, Composition="Thick Film", Contact Plating=Tin, Depth=0.85mm, Features="Automotive AEC-Q200", Height=0.45mm, Lead Free="Lead Free", Length=1.55mm, Military Standard=Not, Mount="Surface Mount", Number of Terminations=2, Packaging="Tape and Reel", Power Rating=100mW, Radiation Hardening=No, Termination=SMD/SMT, Voltage Rating (DC)=75V, Weight=7.1E-05oz, Width=0.033inch
U1 U2: library part CMP-04894-000051-1, "IC AUDIO 2 CIRCUIT 8SOIC"
U3 U4 U5 U6: library part CMP-0188-00377-2, "7/8-Bit Single/Dual SPI Digital POT with Volatile Memory, 8-Pin SOIC 150mil, Extended Temperature, Tape and Reel", Code_IPC=SOIC127P600-8, Code_JEDEC=MS-012, ComponentLink1Description="Manufacturer URL", ComponentLink1URL=http://www.microchip.com/, ComponentLink2Description=Datasheet, ComponentLink2URL=http://ww1.microchip.com/downloads/en/DeviceDoc/22060b.pdf, ComponentLink3Description="Package Specification", ComponentLink3URL=http://www.microchip.com/stellent/groups/techpub_sg/documents/packagingspec/en012702.pdf, DatasheetVersion="revB, Dec-2008", PackageDescription="8-Lead Plastic Small Outline (SN) - Narrow, 3.90mm Body [SOIC]", PackageReference=SOIC-SN8, PackageVersion="revBB, Aug-2009", RevisionNote="URLs added."
U3.3V U5V: library part CMP-003-000000-1, "4.5V to 17V Input, 1A Synchronous Step-Down Voltage Regulator in 6-pin SOT-23", Package="SOT-23-THN-6 Texas Instruments", Check_prices=https://www.snapeda.com/parts/TPS561201DDCR/Texas+Instruments/view-part/?ref=eda, Component Type=Standard, Design Item ID=TPS561201DDCR, MF="Texas Instruments", MP=TPS561201DDCR, Pin Count=6, SnapEDA_Link=https://www.snapeda.com/parts/TPS561201DDCR/Texas+Instruments/view-part/?ref=snap, Source=TPS561201DDCR.SchLib
X1M-EN X2M-IO: library part CMP-011-00015-1, "TS02-66-43-BK-100-LCR-D - 6 x 6 mm, 4.3 mm Actuator Height, 100 gf, Black, Long Crimped, Through Hole, SPST, Tactile Switch", Manufacturer_Name="Same Sky", Mouser Part Number=179-TS026643BK100LCR, Datasheet Link=https://www.sameskydevices.com/product/resource/TS02-66-43-BK-100-LCR-D.pdf, Design Item ID=TS02-66-43-BK-100-LCR-D, Geometry.Height=4.5mm, Manufacturer_Part_Number=TS02-66-43-BK-100-LCR-D, Mouser Price/Stock=https://www.mouser.co.uk/ProductDetail/Same-Sky/TS02-66-43-BK-100-LCR-D?qs=A6eO%252BMLsxmQKx8LKBmCQ6w%3D%3D, Source=TS02-66-43-BK-100-LCR-D.SchLib

## Via types
v1: diameter 50, hole 28, Top Layer to Bottom Layer, 141 vias

## Nets (pads, with @x,y where several pads share a name; then routed paths per layer and width w, separated by ;. In a path a pad name is that pad's centre, name@x,y a point inside that pad or via, vN(x,y) a via of type N, cw(c..) or ccw(c..) an arc to the next point about the centre after c; other vN are vias at no path point)
GND: "Cout 3.3V 47uF.2" "Cout 5V 47uF.2" B1-MCU.1 B1-MCU.2 B1-MCU.36 B1-MCU.37 B1-MCU.38 B1-MCU.39 B1-MCU.40 B1-MCU.41 B1-MCU.42 B1-MCU.43 B1-MCU.44 B1-MCU.45 B1-MCU.46 B1-MCU.47 B1-MCU.48 B1-MCU.49 B1-MCU.50 B1-MCU.51 B1-MCU.52 B1-MCU.53 B1-MCU.54 B1-MCU.55 B1-MCU.56 B1-MCU.57 B1-MCU.58 B1-MCU.59 B1-MCU.60 B1-MCU.61 C1M-P.2 C2M-P.N C3M-EN.N C4M-EN.2 C5.2 C5M-IO.N C6.N C7.2 C8.N C9.N C10.2 C47uF1.N C47uF2.N C47uF3.N C47uF4.N C47uF5.N Cin1.1 Cin2.1 Cin3.1 Cin4.1 J1M.1 J1M.2 J3.3V.2 J4.1 J5V.2 J12V.2 Jamp.2 Pin.2 R2.1 R10.1 RA3.3V.1 RA5V.1 RL3.3VB.1 RLoad5V.1 U1.4 U2.4 U3.3V.1 U3.4 U4.4 U5.4 U5V.1 U6.4 U6.5 X1M-EN.1 X2M-IO.1 | length 520.5
  Top Layer w10: U6.5 3825,4475 v1(3860,4440) ; X2M-IO.1 6289.53,2665 6329.06,2704.53 6424.06,2704.53 6450.95,2677.64 B1-MCU.51
  other v1: 6435,2300 7540,2310 7135,2320 7205,2320 6710,2345 6785,2345 6860,2345 6435,2370 5000,2375 5140,2380 5070,2385 5965,2640 6045,2640 5365,2660 5280,2665 5970,2695 6045,2695 7140,2695 4630,2700 4720,2705 8065,2720 7140,2765 3770,2800 3930,2800 4820,2825 4930,2825 3850,2835 3175,2945 3175,3035 7865,3105 3895,3220 5275,3240 4165,3250 5345,3270 5275,3305 3895,3310 7385,3335 4165,3345 4665,3400 4765,3400 3695,3470 3860,3470 6355,3495 3780,3525 5075,3545 5210,3550 5005,3620 5155,3625 5290,3625 3210,3680 3310,3685 3210,3785 3310,3785 3905,3905 5260,3925 4145,3960 5325,3970 3905,4000 5262.34,4003.07 4145,4030 6750,4080 4610,4180 5405,4340 3470,4450 6108.03,4750.89
NetB1-MCU_3: "Cout 3.3V 47uF.1" B1-MCU.3 C1M-P.1 C2M-P.P C47uF5.P J3.3V.1 L3.3V.2 R1M-EN.1 R2M-IO.2 RB3.3V.2 RL3.3VA.2
  other v1: 7365,2385 7285,2390 7285,2460 7365,2460 5255,3025 5335,3025 7290,3030 7390,3030 7285,3125 7395,3130
NetB1-MCU_8: B1-MCU.8 C3M-EN.P C4M-EN.1 R1M-EN.2 X1M-EN.4
  other v1: 7625,2875 7705,2875
NetB1-MCU_9: B1-MCU.9 U6.1 | length 5500.6
  Top Layer w10: v1(3390,4630) 3392.5,4627.5 3573.01,4627.5 U6.1 ; v1(4920,3450) 6995.86,3450 7205.86,3240 v1(7215,3240) ; B1-MCU.9 7166.42,2577.24 7184.18,2595 v1(7195,2595)
  Bottom Layer w10: v1(3390,4630) 3730.9,4289.1 4206.76,4289.1 4757.93,3737.93 4762.07,3737.93 4775,3725 4775,3595 v1(4920,3450) ; v1(7195,2595) 7195,3209.18 7215,3229.18 v1(7215,3240)
NetB1-MCU_10: B1-MCU.10 U3.1 | length 3048.7
  Top Layer w10: v1(6070,4920) 6072.5,4917.5 6228.52,4917.5 U3.1 ; B1-MCU.10 7097.92,2608.74 7114.18,2625 v1(7125,2625)
  Bottom Layer w10: v1(6070,4920) 6070,4839.5 6231.49,4678 6231.49,4278 7175,3334.5 7175,2675 v1(7125,2625)
NetB1-MCU_16: B1-MCU.16 B1-MCU.24 U3.3 U4.3 U5.3 U6.3 | length 6098.1
  Top Layer w10: U6.3 3607.01,4525 4051,4081 4896,4081 ; U5.3 4732.01,4245 4896,4081 ; U4.3 6013.01,4022.5 5897.5,4022.5 v1(5895,4025) 5589.14,4025 5576.08,4038.07 4938.94,4038.07 4896,4081 ; v1(6050,4810) 6052.5,4812.5 6228.52,4812.5 U3.3 ; B1-MCU.24 6598.27,2667.8 6608.79,2657.28 6608.79,2657.07 6620.86,2645 6827.44,2645 6850.24,2667.8 6850.24,2683.54 6922.35,2755.65 6922.35,2772.35 v1(6930,2780)
  Bottom Layer w10: v1(6050,4810) 6050,4495 5895,4340 v1(5895,4025) 5989.5,4025 6930,3084.5 v1(6930,2780)
NetB1-MCU_20: B1-MCU.20 U5.1 | length 3859.4
  Top Layer w10: v1(4465,4355) 4569.4,4355 4579.4,4345 U5.1 ; v1(6075,3650) 6080,3655 6300,3655 v1(6305,3660) ; B1-MCU.20 6724.25,2683.54 6765.71,2725 6840,2725 6860,2745 v1(6860,2785)
  Bottom Layer w10: v1(4465,4355) 4465,4065.86 4480.86,4050 5579.14,4050 5979.14,3650 v1(6075,3650) ; v1(6305,3660) 6305.36,3660 6860,3105.36 v1(6860,2785)
NetB1-MCU_21: B1-MCU.21 U4.1 | length 2237.5
  Top Layer w10: v1(5770,4145) 5825.82,4145 5850.82,4120 U4.1 ; B1-MCU.21 6692.76,2727.76 6719.93,2754.93 6744.93,2754.93 v1(6780,2790)
  Bottom Layer w10: v1(5770,4145) 5770,4100.5 6263.18,3607.32 6336.82,3607.32 6780,3164.14 v1(6780,2790)
NetB1-MCU_22: B1-MCU.22 R2M-IO.1
NetB1-MCU_23: B1-MCU.23 C5M-IO.P X2M-IO.4 | length 357.4
  Top Layer w10: X2M-IO.4 6508.07,2760 6630,2760 ; B1-MCU.23 B1-MCU.23@6629.76,2683.54
NetB1-MCU_25: B1-MCU.25 U3.2 U4.2 U5.2 U6.2 | length 6115
  Top Layer w10: U6.2 3607.01,4575 3711.18,4470.83 3711.18,4465.97 3877.15,4300 v1(4515,4300) 4517.5,4297.5 4698.01,4297.5 U5.2 ; v1(5735,4065) 5812.61,4065 5832.61,4085 5899.4,4085 5914.4,4070 U4.2 ; v1(5980,4865) U3.2 ; v1(6435,2555) 6520.24,2640.24 B1-MCU.25
  Bottom Layer w10: v1(4515,4300) 4515,4075.86 4525.86,4065 v1(5735,4065) ; v1(5980,4865) 5980,4591.33 5735,4346.33 v1(5735,4065) ; v1(6435,2555) 6428.73,2561.26 6395,2561.26 6230,2726.26 6230,3570 v1(5735,4065)
NetB1-MCU_30: B1-MCU.30 J2M.1 | length 506
  Top Layer w10: J2M.1 6137.76,2482.76 B1-MCU.30
NetB1-MCU_31: B1-MCU.31 J2M.2 | length 296.1
  Top Layer w10: J2M.2 6284.83,2420 6316.09,2451.26 B1-MCU.31
NetC1_1: C1.1 R16.1 R17.1
NetC1_2: C1.2 R1.1 R2.2 U1.3 | length 1032.6
  Top Layer w10: U1.3 6743.7,4177.67 6737.84,4171.81 6710.22,4171.81 6703.19,4164.78 6703.19,3832.67 7030.86,3505 C1.2
NetC2_N: C2.N R7.1 U3.5 | length 455.5
  Top Layer w10: U3.5 6444.77,4765 6451.06,4758.71 6451.06,4564.57 C2.N 6455.63,4339.69 R7.1
NetC2_P: C2.P R3.1 U3.7 | length 847
  Top Layer w10: U3.7 6455.18,4865 6471.93,4848.25 6545.89,4848.25 6720.94,4673.2 6720.94,4560 ; C2.P 6720.94,4560 ; R3.1 6834.06,4446.89 6720.94,4560
NetC3_N: C3.N R6.1
NetC3_P: C3.P U4.6 | length 671.5
  Top Layer w10: U4.6 6383.43,4020 6408.43,4045 v1(6415,4045)
  Bottom Layer w10: C3.P 6160,4300 v1(6415,4045)
NetC4_N: C4.N R7.2 R8.1 R13.1 R14.1 U2.1 | length 668.5
  Top Layer w10: U2.1@5500,4535 U2.1
  Bottom Layer w10: C4.N@5325,4579.37 5325.63,4580 5549.14,4580 5555,4574.14 5555,4355 v1(5695,4215)
NetC4_P: C4.P R5.2 R6.2 U2.2 | length 1225.9
  Top Layer w10: C4.P@5325,4500.63 5484.37,4500.63 5500,4485 U2.2 ; v1(5930,4615) 6014.06,4530.94 R5.2
  Bottom Layer w10: C4.P@5325,4500.63 5325,4534.61 5293.35,4566.26 5293.35,4592.48 5315.86,4615 v1(5930,4615)
NetC5_1: C5.1 C6.P C7.1 C8.P C47uF1.P C47uF2.P C47uF3.P Cin1.2 Cin2.2 Cin3.2 Cin4.2 J12V.1 Pin.1 R1.2 R9.2 U1.8 U2.8 U3.3V.3 U3.3V.5 U5V.3 U5V.5 | length 45
  Top Layer w10: U5V.3 U5V.3@4151.61,3719.21 ; U3.3V.3 U3.3V.3@4175.67,3036.61 ; U5V.5@4229.33,3743.39 U5V.5 ; U3.3V.5@4243.07,3067.4 U3.3V.5
  other v1: 3480,3010 3545,3010 3615,3010 3995,3010 4080,3010 4340,3025 4415,3025 7015,3600 7080,3600 3625,3655 3500,3665 4340,3680 3995,3690 4075,3690 3570,3695 4335,3735 7005,4375 5785,4690
NetC9_P: C9.P C10.1 R9.1 R10.2 U1.5
NetC11_N: C11.N R11.2 U5.5 | length 455.2
  Top Layer w10: U5.5 4857.99,4195 4836.18,4216.81 4836.18,4525.55 C11.N
NetC11_P: C11.P R13.2 U5.7 | length 549.4
  Top Layer w10: U5.7 4977.17,4295 R13.2@5143.11,4460.94 ; C11.P 5039.37,4520 5084.06,4520 R13.2@5143.11,4460.94 ; R13.2 R13.2@5143.11,4460.94
NetC12_N: C12.N R12.1 R14.2 U2.6 | length 1384.1
  Top Layer w10: R12.1 4626.89,4784.06 4673.46,4830.63 C12.N 5069.69,4830.63 5133.11,4894.06 R14.2 5162.56,4871.5 5327.65,4871.5 5590.58,4608.56 5590.58,4545.28 5627.02,4508.83 5638.76,4508.83 5712.6,4435 U2.6
NetC12_P: C12.P U5.6 | length 849.1
  Top Layer w10: U5.6 v1(5010,4245)
  Bottom Layer w10: C12.P 5010,4754.37 v1(5010,4245)
NetC13_1: C13.1 R11.1 R12.2 U2.7 | length 1540.5
  Top Layer w10: v1(5562.48,4261.53) 5663.12,4261.53 5771.81,4370.22 5771.81,4463.19 5750,4485 U2.7
  Bottom Layer w10: C13.1 4653.49,4500 4943.49,4210 5510.95,4210 v1(5562.48,4261.53)
NetC13_2: C13.2 U6.6
NetC47uF4_P: "Cout 5V 47uF.1" C47uF4.P J5V.1 L5V.2 RB5V.2 RLoad5V.2 U3.8 U4.8 U5.8 U6.8 | length 269.6
  Top Layer w10: 4725,3750 4725.86,3750.86 4725.86,3759.14 4725,3760 ; 5017.51,3780 5030,3767.51 5032.98,3764.53 RLoad5V.2
  other v1: 4870,3795 4785,3800 6200,4185 4910,4415 3770,4705 6535,4920
NetCB3.3V_1: CB3.3V.1 U3.3V.6
NetCB3.3V_2: CB3.3V.2 L3.3V.1 U3.3V.2
  other v1: 4050,3130 4380,3130 4420,3190 4045,3195
NetCB5V_1: CB5V.1 U5V.6
NetCB5V_2: CB5V.2 L5V.1 U5V.2 | length 21.2
  Top Layer w10: L5V.1@4468.53,3795 L5V.1
  other v1: 4025,3805 4435,3805 3995,3870 4065,3875 4405,3875 4475,3875
NetJ4_2: J4.2 R16.2
NetJ4_3: J4.3 R17.2
NetJamp_1: Jamp.1 U6.7 | length 445.1
  Top Layer w10: U6.7 3795.98,4575 3925.48,4704.49 3936.22,4704.49 Jamp.1
NetR3_2: R3.2 R4.1 U1.1 U1.2 | length 417.4
  Top Layer w10: R4.1 6484.06,4074.06 6695,4285
NetR4_2: R4.2 U4.5
NetR5_1: R5.1 U3.6 | length 318.4
  Bottom Layer w10: v1(6266.49,4653.43) 6363.43,4653.43 v1(6520,4810)
NetR8_2: R8.2 U4.7
NetRA3.3V_2: RA3.3V.2 RB3.3V.1 U3.3V.4
NetRA5V_2: RA5V.2 RB5V.1 U5V.4 | length 25.2
  Top Layer w10: U5V.4 U5V.4@4252.87,3712.6 ; 4719.14,3565 4725,3570.86
NetRL3.3VA_1: RL3.3VA.1 RL3.3VB.2
NetU1_6: U1.6 U1.7 U2.3 U2.5 | length 301.5
  Top Layer w10: U2.3 5537.4,4435 5657.4,4315 v1(5660,4315) 5667.65,4322.65 5667.65,4340.06 5712.6,4385 U2.5
  other v1: 7060,4225 7140,4225
pads on no net: B1-MCU.4 B1-MCU.5 B1-MCU.6 B1-MCU.7 B1-MCU.11 B1-MCU.12 B1-MCU.13 B1-MCU.14 B1-MCU.15 B1-MCU.17 B1-MCU.18 B1-MCU.19 B1-MCU.26 B1-MCU.27 B1-MCU.28 B1-MCU.29 B1-MCU.32 B1-MCU.33 B1-MCU.34 B1-MCU.35 J4.None Pin.3 X1M-EN.2 X1M-EN.3 X2M-IO.2 X2M-IO.3

## Polygon pours and split planes (outlines as drawn)
NetC5_1 on POWER "NETC5_1_L03_P020" (solid, pour order 20): 5895,4830 5890,4645 5735,4640 5565,4640 5570,4795 5570,4830
NetC5_1 on POWER "NETC5_1_L03_P019" (solid, pour order 19): 3630,4845 3675,4800 5895,4800 5895,4940 5730,4940 3630,4940
NetC5_1 on POWER "NETC5_1_L03_P018" (solid, pour order 18): 3665,4325 3460,4325 3460,4940 3670,4940
NetC5_1 on POWER "NETC5_1_L03_P017" (solid, pour order 17): 6885,4495 6885,4360 7460,4360 7460,4495
NetC5_1 on POWER "NETC5_1_L03_P016" (solid, pour order 16): 7650,3385 7650,4495 7450,4495 7450,3385
NetC5_1 on POWER "NETC5_1_L03_P015" (solid, pour order 15): 3595,3598.89 3595,3375 7665,3375 7675,3385 7675,3620
NetC47uF4_P on POWER "NETC47UF4_P_L03_P013" (solid, pour order 13): 6580,4965 6580,4815 6105,4340 5530,4340 5530,4460 5535,4465
NetU1_6 on POWER "NETU1_6_L03_P014" (solid, pour order 14): 5625,4335 7195,4335 7190,4330 7195,4190 5700,4240 5615,4325
NetC47uF4_P on POWER "NETC47UF4_P_L03_P012" (solid, pour order 12): 3730,4735 3730,4595 3950,4375 5015,4375 5015,4705 4985,4735
NetC47uF4_P on POWER "NETC47UF4_P_L03_P011" (solid, pour order 11): 5575,4145 6270,4145 6270,4215 5575,4215
NetC47uF4_P on POWER "NETC47UF4_P_L03_P010" (solid, pour order 10): 4860,4455 4860,4375 5505,4375 5505,4445 5495,4455
NetC47uF4_P on POWER "NETC47UF4_P_L03_P009" (solid, pour order 9): 5585,3745 5580,3740 5435,3740 5435,4460 5575,4460
NetC5_1 on POWER "NETC5_1_L03_P004" (solid, pour order 4): 3470,3160 3810,3160 3810,4325 3790,4345 3459.96,4345
GND on GND "GND_L02_P000" (solid, pour order 0): 8440,5010 8440,2265 8445,2260 2970,2260 2970,5915 2970,2260 2970,5010

## Other copper
Top Layer:
  region net GND: 3730,2910 3965,2910 3965,2760 3730,2760
  region net GND: 3665,3600 3900,3600 3900,3435 3665,3435
  region net GND: 4130,3090 4205,3090 4205,3390 4130,3390
  region net GND: 4960,2580 5180,2580 5180,2335 4960,2335
  region net GND: 4595,2810 4755,2810 4755,2670 4595,2670
  region net GND: 4775,2955 4980,2955 4980,2770 4775,2770
  region net GND: 4625,3490 4805,3490 4805,3365 4625,3365
  region net GND: 5240,3330 5570,3330 5570,3205 5240,3205
  region net GND: 3435,4490 3620,4490 3620,4405 3435,4405
  region net GND: 4115,3775 4175,3775 4175,4055 4115,4055
  region net GND: 4975,3730 5340,3730 5340,3515 4975,3515
  region net GND: 6485,2400 6485,2275 6385,2275 6385,2400
  region net GND: 5935,2730 6220,2730 6220,2610 5935,2610
  region net GND: 6415,2305 7235,2305 7235,2275 6415,2275
  region net GND: 6675,2595 6900,2595 6900,2305 6675,2305
  region net GND: 7000,2365 7040,2365 7040,2300 7000,2300
  region net GND: 7105,2360 7105,2275 7235,2275 7235,2360
  region net GND: 6065,3985 5560,3985 5555,3980 5555,3955 6065,3955
  region net GND: 5475,4025 5575,4025 5575,3940 5570,3935 5475,3935
  region net GND: 5625,4850 5890,4850 5890,4785 5625,4785
  region net GND: 7005,2660 7180,2660 7180,2800 7005,2800
  region net GND: 7280,3365 7420,3365 7420,3280 7280,3280
  region net GND: 7950,2765 7950,2665 8095,2665 8095,2765
  region net GND: 7480,3785 7360,3785 7360,4170 7480,4170
  region net GND: 4740,4205 4570,4205 4570,4130 4575,4125 4740,4125
  region net GND: 5545,4395 5545,4310 5370,4310 5370,4395
  region net GND: 6715,4160 6715,4050 6785,4050 6785,4160
  region net GND: 6075,4780 6275,4780 6275,4715 6075,4715
  region net GND: 6910,4530 7180,4530 7180,4580 6910,4580
  region net GND: 7130,4540 7180,4540 7180,4435 7130,4435
  region net NetJ4_2: 7880,3725 7880,3630 8195,3630 8195,3720
  region net NetJ4_3: 7870,3345 8185,3345 8185,3260 7870,3260
  region net NetCB5V_2: 4100,3735 3965,3735 3965,3905 4100,3905
  region net NetC47uF4_P: 3725,4735 3805,4735 3805,4610 3725,4610
  region net NetC47uF4_P: 4865,4445 4865,4325 4970,4325 4970,4445
  region net NetC47uF4_P: 6380.42,4885 6565,4885 6565,4955 6380.42,4955
  region net NetC47uF4_P: 6150,4200 6240,4200 6240,4110 6150,4110
  region net NetC47uF4_P: 4700,3655 4760,3655 4760,3785 4700,3785
  region net NetC47uF4_P: 4535,3840 4540,3835 5585,3835 5585,3740 4535,3740
  region net NetC11_N: 4705,4490 4925,4490 4925,4610 4705,4610
  region net NetU1_6: 6925,4275 7175,4275 7175,4180 6925,4180
  region net NetR8_2: 6290,4125 6290,4055 6360,4055 6360,4125
  region net NetR8_2: 6160,4085 6360,4085 6360,4055 6160,4055
  region net NetC5_1: 6985,3565 7115,3565 7115,3640 6985,3640
  region net NetC13_2: 3935,4535 3935,4465 4010,4465 4010,4535
  region net NetC13_2: 3720,4535 4010,4535 4010,4510 3720,4510
  region net NetC13_1: 4660,4690 4660,4455 4495,4455 4495,4690
  region net NetC4_N: 5105,4800 5105,4545 5190,4545 5190,4800
  region net NetC13_1: 4580,4635 4785,4635 4785,4690 4580,4690
  region net NetC4_N: 5485,4525 5550,4525 5550,4555 5485,4555
  region net NetC4_N: 5115,4545 5550,4545 5550,4635 5115,4635
  region net NetC5_1: 5630,4765 5885,4765 5890,4760 5890,4520 5630,4520
  region net NetC4_N: 5660,4245 6490,4245 6490,4215 5660,4215
  region net NetR5_1: 6135,4680 6300,4680 6300,4615 6135,4615
  region net NetR5_1: 6370,4830 6550,4830 6550,4790 6370,4790
  region net NetC4_P: 6125,4560 6325,4560 6325,4500 6125,4500
  region net NetC3_N: 6320,4435 6320,4350 6035,4350 6035,4430.48
  region net NetC5_1: 6885,4495 7100,4495 7100,4295 6885,4295
  region net NetR4_2: 6160,3990 6395,3990 6395,3900 6160,3900
  region net NetR3_2: 6655,4475 6765,4475 6765,4235 6655,4235
  region net NetC9_P: 6920,4160 7330,4160 7330,3765 6920,3765
  region net NetC5_1: 6925,3730 7115,3730 7115,3625 6925,3625
  region net NetC1_2: 7165,3730 7165,3295 7235,3295 7230,3300 7230,3730
  region net NetC1_1: 7835,3730 7835,3265 7740,3265 7740,3730
  region net NetB1-MCU_23: 6315,2950 6315,2885 6390,2885 6390,2950
  region net NetB1-MCU_23: 6620,2660 6635,2660 6635,2760 6620,2760
  region net NetB1-MCU_22: 6655,2920 6740,2920 6740,2770 6655,2770
  region net NetB1-MCU_22: 6655,2655 6670,2655 6670,2780 6655,2780
  region net NetB1-MCU_8: 7740,2780 7855,2780 7855,2660 7740,2660
  region net NetB1-MCU_3: 7250,2485 7405,2485 7405,2350 7250,2350
  region net NetB1-MCU_8: 7665,2925 7750,2925 7750,2635 7665,2635
  region net NetB1-MCU_8: 7000,2555 7000,2535 7380,2535 7380,2555
  region net NetB1-MCU_8: 7330,2845 7380,2845 7380,2535 7330,2535
  region net NetB1-MCU_8: 7330,2925 7705,2925 7705,2825 7330,2825
  region net NetB1-MCU_3: 7000,2400 7255,2400 7255,2375 7000,2375
  region net NetCB5V_2: 4375,3960 4375,3740 4510,3740 4510,3960
  region net NetCB5V_1: 4360,3960 4360,3780 4205,3780 4205,3960
  region net NetRA5V_2: 4750,3510 4290,3510 4290,3650 4295,3645 4750,3645
  region net NetRA5V_2: 4215,3725 4290,3725 4300,3715 4300,3510 4215,3510
  region net NetC5_1: 4205,3040 3460,3040 3460,2945 4205,2945
  region net NetC5_1: 3460,3630 4180,3630 4180,3725 4175,3720 3460,3720
  region net NetC5_1: 4205,3765 4355,3765 4355,3735 4205,3735
  region net NetC5_1: 4310,3765 4310,3655 4365,3655 4365,3765
  region net NetCB5V_2: 4175,3765 4175,3735 4010,3735 4010,3765
  region net NetCB3.3V_1: 4305,3200 4305,3090 4230,3090 4230,3200
  region net NetCB3.3V_2: 4205,3080 4205,3055 4085,3055 4085,3080
  region net NetCB3.3V_2: 4105,3055 4000,3055 4000,3225 4105,3225
  region net NetCB3.3V_2: 4325,3230 4325,3090 4475,3090 4475,3230
  region net NetC5_1: 4230,3080 4335,3080 4335,3055 4230,3055
  region net NetC5_1: 4315,3080 4450,3080 4450,2990 4315,2990
  region net NetB1-MCU_3: 4505,3190 7625,3190 7625,2985 4505,2985
  region net NetRA3.3V_2: 4230,3040 4295,3040 4295,2855 4230,2855
  region net NetRA3.3V_2: 4675,2965 4230,2965 4230,2835 4675,2835
  region net NetRL3.3VA_1: 5005,2965 5180,2965 5180,2635 5005,2635
Bottom Layer:
  rectangle net GND: 3150,2900 3295,3060
  rectangle net GND: 3795,3175 3925,3340
  rectangle net GND: 5247.38,2640 5655,2761.62
  rectangle net GND: 3790,3880 3925,4015
  rectangle net GND: 4779.53,3970 5275,4035.8
  rectangle net NetC47uF4_P: 4755,3755 4905,3955
  rectangle net NetC5_1: 3315,2935 3480,3075
  rectangle net NetC5_1: 3605,3190 3770,3340
  rectangle net NetC5_1: 3610,3845 3775,3985
  rectangle net NetB1-MCU_3: 5210,2785 5675,3055
  region net GND: 3360,4235 3360,3285 3150,3285 3150,4235
  region net GND: 5925,3339.65 5925,3205 5240,3205 5240,3330
  region net GND: 5575,4040 5215,4040 5215,3885 5575,3885
  region net GND: 6220,2730 6220,2620 5935,2620 5935,2730
  region net GND: 7480,2460 7585,2460 7585,2275 7480,2275
  region net GND: 6305,3345 6400,3345 6400,3530 6305,3530
  region net GND: 7820,2970 7915,2970 7915,3145 7820,3145
  region net NetCB5V_2: 3965,3905 4500,3905 4500,3780 3965,3780
  region net NetB1-MCU_23: 6300,3330 6395,3330 6395,2875 6300,2875
  region net NetB1-MCU_8: 7595,2955 7940,2955 7940,2615 7595,2615
  region net NetB1-MCU_3: 7240,3195 7440,3195 7440,2350 7240,2350
  region net NetC5_1: 3642.5,3710 3642.5,2975 3465,2975 3465,3710
  region net NetC5_1: 3940,3660 4390,3660 4390,3760 3940,3760
  region net NetCB3.3V_2: 4000,3105 4475,3105 4475,3215 4420,3215 4000,3215
  region net NetC5_1: 3965,2980 4450,2980 4450,3080 3965,3080
  region net NetC5_1: 3445,4235 3445,3660 3645,3660 3645,4235

## Silkscreen, mask and mechanical layers (free items; w line width, h text height)
Board Outline:
  the board outline again, w10

## Text inside footprints (layer, text, board x,y; h text height)
J4: Mechanical 4 "PCB EDGE" at 8457.8,3762.44 h73.82 r90